# Altium PCB CopterControl 3D.PcbDoc (part 2 of 2)
Units mil, origin at the board's own origin, x right, y up, seen from the top; angles counter-clockwise.
Board outline 1417.32 x 1417.32 mil, 2 copper layers (Top Layer, Bottom Layer), stack 61.2 mil thick; 64 components, 58 nets, 262 pads, 81 vias.
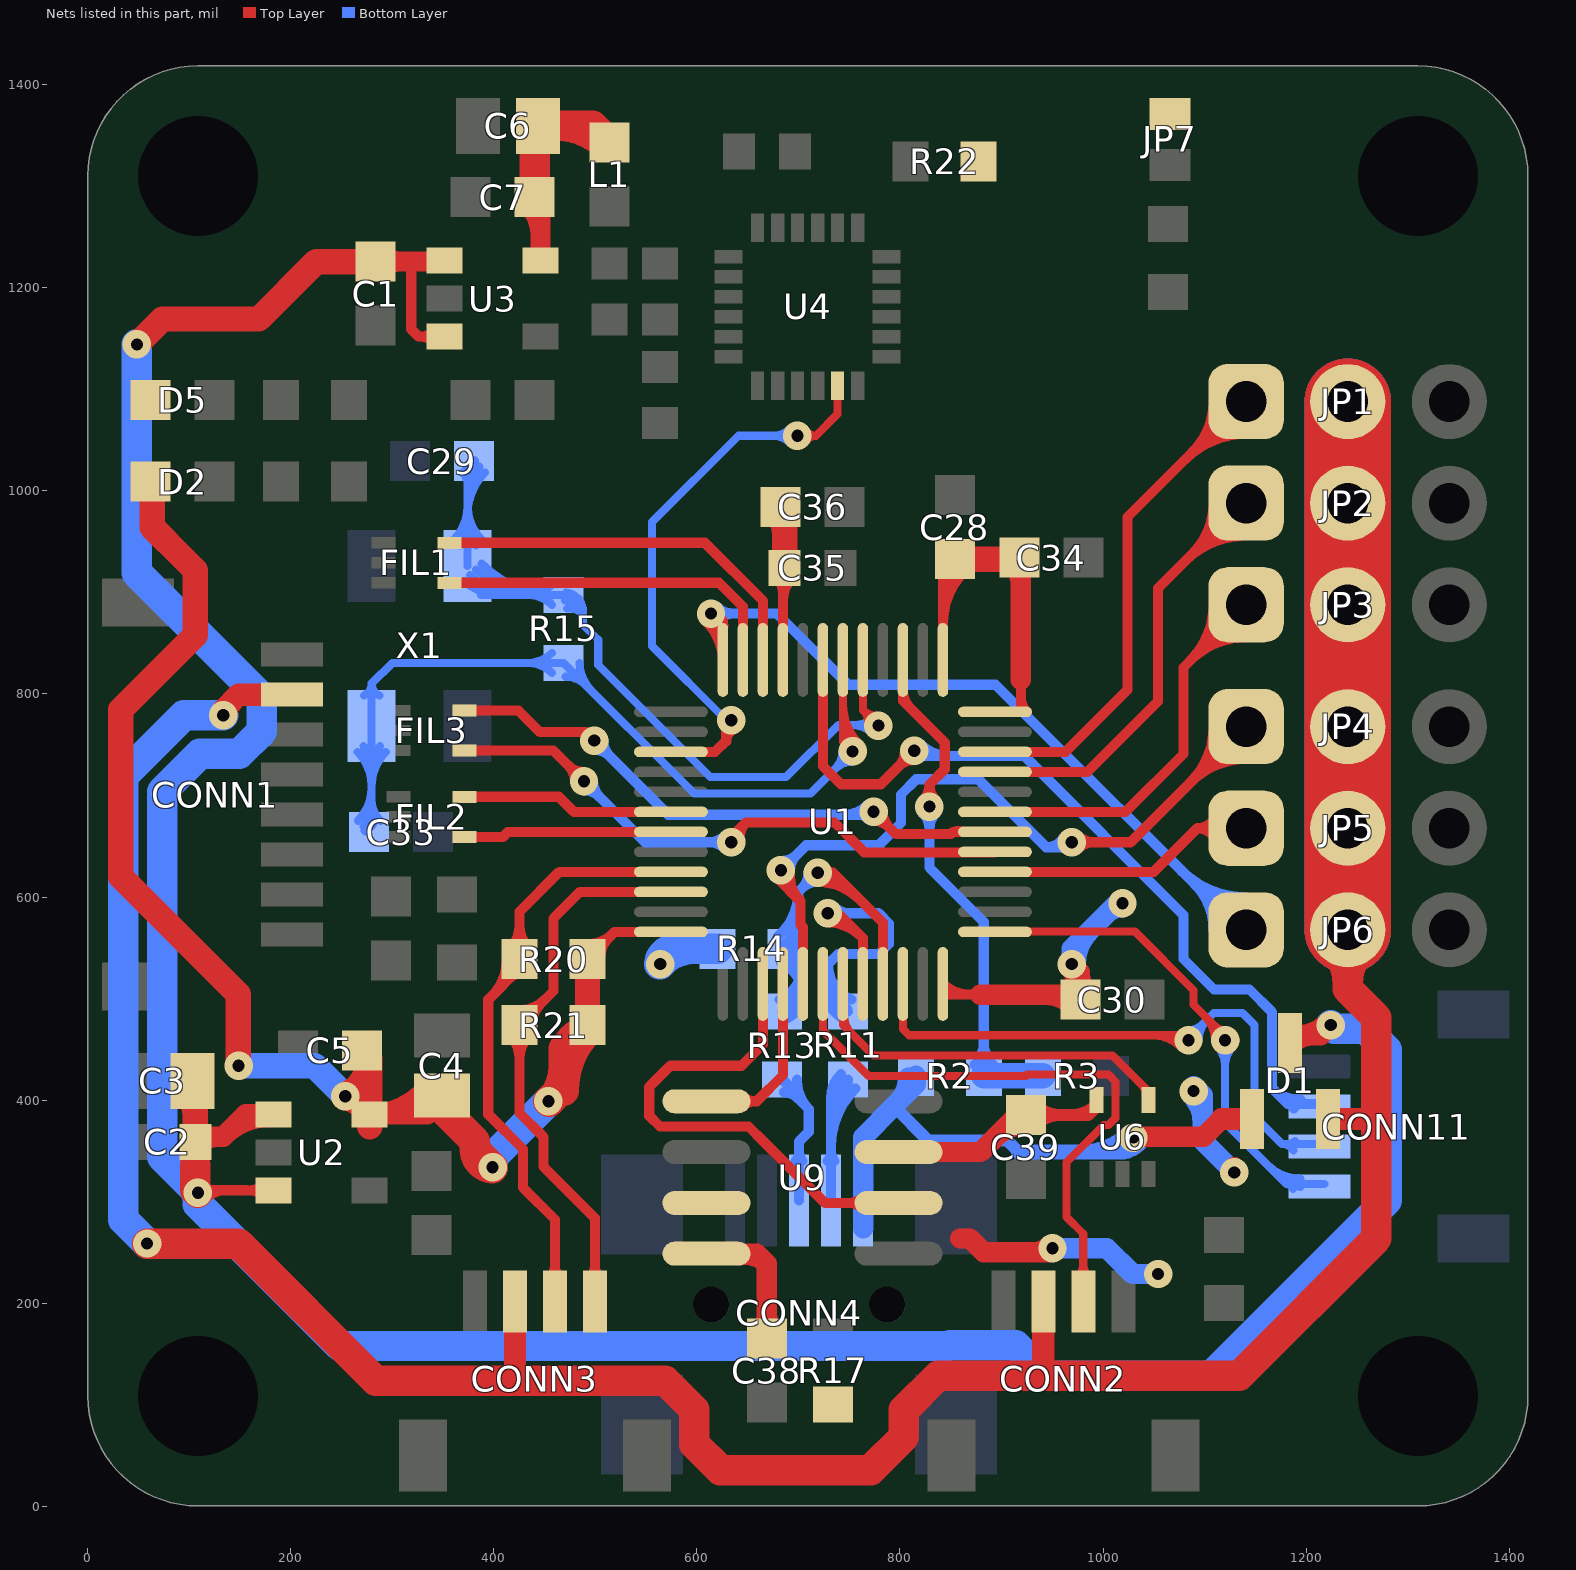
[diagram p2: the nets of this part, all layers, seen from the top]

## Via types
v1: diameter 28, hole 12, Top Layer to Bottom Layer, tented both sides, 81 vias

## Nets (pads, with @x,y where several pads share a name; then routed paths per layer and width w, separated by ;. In a path a pad name is that pad's centre, name@x,y a point inside that pad or via, vN(x,y) a via of type N, cw(c..) or ccw(c..) an arc to the next point about the centre after c; other vN are vias at no path point) (continued)
NetU1_27: U1.27 U9.2 | length 523.8
  Top Layer w10: U1.27@665.1,514.55 665.1,455.1 644,434 574,434 553.2,413.2 553.2,384.8 563.81,374.19 650.91,374.19 665.82,359.28 726.09,299 U9.2@798.49,299 ; U9.2@762.18,294.18 ccw(c750.55,282.56) 750.55,299 ccw(c750.55,315.44) U9.2@762.18,303.82
NetU1_28: U1.28 U9.5 | length 201.6
  Top Layer w10: U9.5@609.51,399 659,399 684.79,424.79 U1.28@684.79,514.55 ; U9.5@645.82,394.18 cw(c657.45,382.56) 657.45,399 cw(c657.45,415.44) U9.5@645.82,403.82
NRST: CONN11.2 U1.7 | length 942.4
  Top Layer w10: U1.7@724.16,833.45 724.16,728.84 742,711 781,711 809,739 814,739 v1(814,744) ; v1@805,744 cw(c783.27,744) 798.64,728.64 cw(c814,713.27) v1@814,735
  Bottom Layer w10: v1(814,744) 814,739 922.18,739 1079,582.18 1079,539 1109,509 1144,509 1166,487 1166,412 ; v1@820.36,750.36 ccw(c847.8,777.8) 847.8,739 ; CONN11.2@1187.64,391.83 ccw(c1181.58,390.12) 1181.58,396.42 ; CONN11.2@1194.13,400.5 cw(c1193.77,439.77) 1166,412 ; CONN11.2@1217.9,396.42 1181.58,396.42 ; 1166,412 1181.58,396.42
OSC_IN: C29.2 R15.2 U1.5 X1.3 | length 1407.7
  Top Layer w8: U1.5@763.53,833.45 763.53,784.07 ; v1@768.83,769.62 ccw(c750.57,771.12) 763.53,784.07 ; v1@777.98,778.77 cw(c776.48,797.02) 763.53,784.07 ; v1(778.8,768.8) 763.53,784.07
  Bottom Layer w8: X1.3@360.64,951.69 ccw(c327.14,985.19) 374.51,985.19 ccw(c421.88,985.19) X1.3@388.38,951.69 ; X1.3@366.29,946.04 ccw(c346.45,965.88) 374.51,965.88 ccw(c402.57,965.88) X1.3@382.73,946.04 ; C29.2@369.4,1017.91 cw(c357.08,1005.58) 374.51,1005.58 ; X1.3@371.41,911.1 ccw(c404.34,944.02) 404.34,897.46 ; X1.3@374.51,926.01 C29.2@374.51,1023.01 ; 374.51,976.68 cw(c432.81,976.68) C29.2@391.59,1017.91 ; 374.51,996 cw(c413.5,996) C29.2@385.93,1023.56 ; X1.3@377.07,916.76 ccw(c423.65,963.34) 423.65,897.47 ; X1.3@382.73,922.41 ccw(c442.96,982.65) 442.96,897.46 ; X1.3@387.47,897.47 R15.2@469,897.47 488,878.46 ; X1.3@388.38,928.07 ccw(c462.28,1001.96) R15.2@462.28,897.46 ; 432.29,902.86 ccw(c438.66,938.28) R15.2@459.2,908.73 ; 436.29,902.14 cw(c430.94,872.37) R15.2@455.77,889.64 ; R15.2@457.33,887.77 ccw(c433.92,864.35) 433.92,897.46 ccw(c433.92,930.58) R15.2@457.33,907.16 ; R15.2@470.42,891.77 cw(c468.57,872.43) 488,872.43 ; R15.2@471.19,899.74 cw(c469.41,881.24) R15.2@488,881.24 ; R15.2@472.55,883.84 cw(c474.72,865.18) 488,878.47 ; R15.2@484.13,893.61 ccw(c498.83,889.3) 488,878.46 ; 753.34,769.34 cw(c753.34,743.34) v1@771.73,761.73 ; 755.97,769.34 ccw(c755.97,791.63) v1@771.73,775.87 ; v1@769.32,765.6 ccw(c764.11,763.84) 764.11,769.34 ; v1@769.7,772.94 cw(c764.11,775.48) 764.11,769.34 ; v1(778.8,768.8) 778.14,768.14 765.31,768.14 764.11,769.34 ; 488,878.46 488,868.23 503,853.23 503,828.23 613.23,718 688,718 739.34,769.34 764.11,769.34
  Bottom Layer w10: C29.2@374.51,1023.01 C29.2@380.5,1029
OSC_OUT: C33.2 R15.1 U1.6 X1.1 | length 1238.7
  Top Layer w8: 743.84,771.11 ccw(c781.11,771.11) v1@754.76,744.76 ; 743.84,790.42 ccw(c800.42,790.42) v1@760.41,750.41 ; U1.6@743.84,833.45 743.84,752.84 v1(753.34,743.34)
  Bottom Layer w8: X1.1@266.15,742.84 cw(c232.65,709.34) 280.02,709.34 cw(c327.39,709.34) X1.1@293.9,742.84 ; C33.2@266.41,675.09 ccw(c233.55,707.95) 280.02,707.95 ; X1.1@271.8,748.5 cw(c251.96,728.66) 280.02,728.66 cw(c308.08,728.66) X1.1@288.24,748.5 ; C33.2@272.07,669.43 ccw(c252.87,688.63) 280.02,688.63 ; X1.1@272.33,798.39 ccw(c267.38,810.02) 280.02,810.02 ; C33.2@280.02,671.52 X1.1@280.02,768.53 280.02,810.02 ; 280.02,695.78 ccw(c309.29,695.78) C33.2@288.59,675.09 ; X1.1@287.71,798.39 cw(c292.66,810.02) 280.02,810.02 ; R15.1@457.33,820.84 ccw(c433.92,797.42) 433.92,830.53 ccw(c433.92,863.65) R15.1@457.33,840.23 ; R15.1@470.97,816.82 cw(c470.97,788.46) 491.02,808.51 ; R15.1@484.68,830.53 ccw(c522.55,830.53) 495.78,803.76 ; v1@743.34,743.34 cw(c719.2,743.34) 736.27,726.27 cw(c753.34,709.2) v1@753.34,733.34 ; v1@754,744 v1(753.34,743.34) 712,702 597.53,702 R15.1@469,830.53 300.53,830.53 280.02,810.02
  Bottom Layer w10: C33.2@274,665.5 C33.2@280.02,671.52
S1_IN: FIL3.5 U1.42 | length 691.1
  Top Layer w10: FIL3.5@371.48,783.69 424.31,783.69 445.68,762.32 490.68,762.32 v1(499,754) ; v1@774,675 cw(c774,653.27) 789.36,668.64 cw(c804.73,684) v1@783,684 ; v1(774,684) 796,662 850.18,662 ; U1.42@862.15,663.96 ccw(c857.54,654.65) 850.18,662 ; U1.42@893.45,664.16 852.34,664.16 850.18,662
  Bottom Layer w10: v1@499,745 cw(c499,723.27) 514.36,738.64 cw(c529.73,754) v1@508,754 ; v1(499,754) 572,681 771,681 v1(774,684) ; 745.03,681 ccw(c745.03,712.97) v1@767.64,690.36 ; 759.51,681 cw(c759.51,669.51) v1@767.64,677.64
S1_OUT: JP1.1 U1.46 | length 694.5
  Top Layer w10: U1.46@893.45,742.9 962.9,742.9 1024,804 1024,974 1137.73,1087.73 JP1.1@1140.73,1087.73 ; 1080.99,1030.99 cw(c1140.73,971.24) JP1.1@1140.73,1055.73 ; 1088.23,1038.23 ccw(c1038.72,1087.73) JP1.1@1108.73,1087.73 ; 1098.06,1048.06 cw(c1140.73,1005.38) JP1.1@1140.73,1065.73 ; 1105.3,1055.3 ccw(c1072.86,1087.73) JP1.1@1118.73,1087.73
S2_IN: FIL3.4 U1.41 | length 704.3
  Top Layer w10: FIL3.4@371.48,744.32 458.68,744.32 v1(489,714) ; v1@480,714 ccw(c458.27,714) 473.64,729.36 ccw(c489,744.73) v1@489,723 ; v1(634,654) 634,659 648.32,673.32 ; v1@642.85,655.65 cw(c662.33,659.3) 648.32,673.32 ; U1.41@893.45,644.47 892.98,644 764.91,644 735.6,673.32 648.32,673.32
  Bottom Layer w10: v1@489,705 cw(c489,683.27) 504.36,698.64 cw(c519.73,714) v1@498,714 ; v1(489,714) 549,654 v1(634,654) ; v1@627.64,647.64 ccw(c612.27,632.27) 612.27,654 ccw(c612.27,675.73) v1@627.64,660.36
S2_OUT: JP2.1 U1.45 | length 626.9
  Top Layer w10: U1.45@893.45,723.21 984.57,723.21 1054,792.64 1054,904 1137.73,987.73 JP2.1@1140.73,987.73 ; 1080.99,930.99 cw(c1140.73,871.24) JP2.1@1140.73,955.73 ; 1088.23,938.23 ccw(c1038.72,987.73) JP2.1@1108.73,987.73 ; 1098.06,948.06 cw(c1140.73,905.38) JP2.1@1140.73,965.73 ; 1105.3,955.3 ccw(c1072.86,987.73) JP2.1@1118.73,987.73
S3_IN: FIL2.5 U1.18 | length 209.2
  Top Layer w10: FIL2.5@371.48,698.69 464.16,698.69 479,683.84 U1.18@574.55,683.84
S3_OUT: JP3.1 U1.43 | length 586.4
  Top Layer w10: U1.43@893.45,683.84 1022.03,683.84 1079,740.82 1079,826 JP3.1@1140.73,887.73 ; JP3.1@1108.73,887.73 cw(c1031.48,887.73) 1086.11,833.11 cw(c1140.73,778.48) JP3.1@1140.73,855.73 ; JP3.1@1118.73,887.73 cw(c1065.62,887.73) 1103.18,850.18 cw(c1140.73,812.62) JP3.1@1140.73,865.73
S4_IN: FIL2.4 U1.19 | length 202.7
  Top Layer w10: FIL2.4@374,659 409,659 414,664 574.39,664 U1.19@574.55,664.16
S4_OUT: JP4.1 U1.29 | length 1069.3
  Top Layer w10: v1@681.78,626.52 ccw(c700.99,624.35) 687.32,610.68 ; v1(682.77,626.41) 681.59,626.41 679.68,628.32 679,629 679,619 702,596 ; v1@691.72,625.4 ccw(c727.37,621.37) 702,596 ; U1.29@704.47,514.55 704.47,570.34 702,572.82 702,596 ; v1(969,654) 1027,654 JP4.1@1140.73,767.73 ; v1@975.36,647.64 cw(c990.73,632.27) 990.73,654 cw(c990.73,675.73) v1@975.36,660.36 ; JP4.1@1108.73,767.73 cw(c1031.48,767.73) 1086.11,713.11 cw(c1140.73,658.48) JP4.1@1140.73,735.73 ; JP4.1@1118.73,767.73 cw(c1065.62,767.73) 1103.18,730.18 cw(c1140.73,692.62) JP4.1@1140.73,745.73
  Bottom Layer w10: v1(682.77,626.41) 681.59,626.41 679.68,628.32 679,629 685.82,629 707.82,651 779.18,651 801,672.82 801,701 816,716 877,716 944,649 ; v1@682.77,635.41 ccw(c682.77,658.22) 698.9,642.09 ; v1@691.77,626.41 cw(c712.42,626.41) 697.82,641 ; v1@961.33,658.7 cw(c944,669.32) 944,649 ; v1(969,654) 964,649 944,649
S5_IN: FIL1.5 U1.10 | length 390.4
  Top Layer w10: FIL1.5@356.48,948.69 607.95,948.69 665.1,891.54 U1.10@665.1,833.45
S5_OUT: JP5.1 U1.40 | length 312.1
  Top Layer w10: U1.40@893.45,624.79 1049.79,624.79 1092.73,667.73 ; JP5.1@1111.2,655.43 ccw(c1092.74,647.74) 1092.74,667.73 ; JP5.1@1111.2,680.04 cw(c1092.74,687.73) 1092.74,667.73 ; JP5.1@1140.73,667.73 1092.73,667.73
S6_IN: FIL1.4 U1.11 | length 351
  Top Layer w10: FIL1.4@356.48,909.32 621.87,909.32 645.42,885.77 U1.11@645.42,833.45
S6_OUT: JP6.1 U1.12 | length 1079.2
  Top Layer w10: v1@607.93,872.36 cw(c571.01,831.97) U1.12@625.73,831.97 ; v1(614,879) 618.54,879 625.73,871.81 U1.12@625.73,833.45 ; v1@614.67,879.74 cw(c591.75,854.65) U1.12@625.73,854.65 ; v1@616.9,870.48 cw(c619.43,863.05) U1.12@626.23,866.97 ; v1@620.3,877.25 cw(c607.7,864.65) U1.12@625.52,864.65
  Bottom Layer w10: v1(614,879) 679,879 749,809 894,809 1135.27,567.73 JP6.1@1140.73,567.73 ; v1@620.36,872.64 cw(c635.73,857.27) 635.73,879 cw(c635.73,900.73) v1@620.36,885.36 ; 1076.77,626.23 ccw(c1140.73,690.19) JP6.1@1140.73,599.73 ; 1089.97,613.03 cw(c1044.68,567.73) JP6.1@1108.73,567.73 ; 1093.84,609.16 ccw(c1140.73,656.05) JP6.1@1140.73,589.73 ; JP6.1@1107.04,595.96 cw(c1078.82,567.73) JP6.1@1118.73,567.73 ; JP6.1@1110.91,592.09 ccw(c1140.73,621.91) JP6.1@1140.73,579.73
SCK: U1.15 U4.23 | length 643
  Top Layer w8: v1(699,1054) 717.23,1054 ; v1@707.43,1048.63 cw(c717.23,1042.38) 717.23,1054 ; v1@707.43,1059.37 ccw(c717.23,1065.62) 717.23,1054 ; U4.23@738.53,1103.41 738.53,1075.3 717.23,1054
  Top Layer w10: U1.15@574.55,742.9 617.9,742.9 629,754 629,769 v1(634,774) ; 629,753.39 cw(c642.18,753.39) v1@637.32,765.63
  Bottom Layer w8: v1(634,774) 629,774 556,847 556,969 641,1054 v1(699,1054) ; v1@691.93,1046.93 ccw(c674.86,1029.86) 674.86,1054 ccw(c674.86,1078.14) v1@691.93,1061.07
SWDCLK: CONN11.4 U1.37 | length 643.2
  Top Layer w8: U1.37@893.72,566 1031.25,566 1089,508.25 1089,494 v1@1120,463 ; 1100.1,482.9 cw(c1076.2,459) v1@1110,459 ; 1109.76,473.24 ccw(c1120,483.49) v1@1120,469
  Top Layer w10: U1.37@893.45,565.73 U1.37@893.72,566 ; v1(1120,459) v1@1120,463
  Bottom Layer w8: v1@1112.93,451.93 cw(c1095.86,434.86) 1120,434.86 cw(c1144.14,434.86) v1@1127.07,451.93 ; v1(1120,459) 1120,378 1180.32,317.68 ; 1161.84,336.16 ccw(c1194.2,368.51) CONN11.4@1194.2,322.76 ; 1175.5,322.5 ccw(c1194.2,341.2) CONN11.4@1194.2,314.76 ; 1181.94,317.68 ccw(c1181.94,327.2) CONN11.4@1188.67,320.47 ; CONN11.4@1186.67,312.85 ccw(c1180.32,311.09) 1180.32,317.68 ; CONN11.4@1217.9,317.68 1180.32,317.68
  Bottom Layer w10: v1(1120,459) v1@1129,459
SWDIO: CONN11.3 U1.34 | length 694.4
  Top Layer w8: U1.34@802.9,514.55 802.9,470.1 809,464 1084,464 v1(1084,459) ; 1047.79,464 cw(c1047.79,422.79) v1@1076.93,451.93 ; 1067.1,464 cw(c1067.1,442.1) v1@1082.59,457.59
  Bottom Layer w8: v1@1084,461.18 1108.82,486 1137,486 1149,474 1149,384 1175.95,357.05 ; v1@1084,469 ccw(c1084,487.87) 1097.34,474.53 ; v1@1094,459 cw(c1123.41,459) 1102.62,479.8 ; 1181.94,357.05 ccw(c1181.94,366.58) CONN11.3@1188.67,359.84 ; CONN11.3@1187.43,350.42 ccw(c1175.95,343.8) 1175.95,357.05 ; CONN11.3@1217.9,357.05 1175.95,357.05
  Bottom Layer w10: v1(1084,459) v1@1084,461.18
TO_REGS: C1.1 C2.1 C3.1 D1.3 U2.1 U2.3 U3.1 U3.3 | length 3563.7
  Top Layer w10: v1@106.56,311.44 156.56,311.44 156.67,311.33 U2.3@183.49,311.33 ; v1@115.36,302.64 cw(c136.62,281.38) 136.62,311.44 ; v1@115.36,315.36 ccw(c124.84,324.84) 124.84,311.44 ; U2.3@173.05,305.82 ccw(c159.75,292.51) 159.75,311.33 ccw(c159.75,330.15) U2.3@173.05,316.84 ; 319,1225.5 319,1159 326.4,1151.6 U3.3@351.76,1151.6 ; U3.3@341.32,1146.09 ccw(c328.02,1132.78) 328.02,1151.6 ccw(c328.02,1170.42) U3.3@341.32,1157.11
  Top Layer w20: C2.1@104,364 106.56,364 134,364 156.13,386.13 U2.1@183.49,386.13 ; 106.56,336.44 C2.1@106.56,359 ; C2.1@110.62,356.9 cw(c127.76,339.77) 127.76,364 ; 135.5,365.5 cw(c178.57,322.43) U2.1@178.57,383.34 ; C1.1@284,1225.5 319,1225.5 350.85,1225.5 U3.1@351.76,1226.4 ; C1.1@290.85,1218.65 cw(c307.38,1202.12) 307.38,1225.5 cw(c307.38,1248.88) C1.1@290.85,1232.35 ; D1.3@1184,456.4 D1.3@1191.6,464 ; D1.3@1185.28,455.12 cw(c1206.72,433.68) 1206.72,464 ; v1@1221.09,476.74 cw(c1191.6,504.49) D1.3@1191.6,464 ; v1(1224,474) 1214,464 D1.3@1191.6,464
  Top Layer w25: v1(49,1144) 74,1169 169,1169 225.5,1225.5 C1.1@284,1225.5 ; C3.1@97.05,406.62 cw(c74.11,383.68) 106.56,383.68 ; C3.1@103.53,419 106.56,415.97 106.56,364 C2.1@106.56,359
  Top Layer w30: 106.56,336.44 106.56,311.44 v1(109,309)
  Bottom Layer w30: v1(49,1144) 49,919 172,796 172,763.26 149.74,741 111,741 73.73,703.73 73.73,344.27 v1(109,309) 109,297.71 248.58,158.13 848.13,158.13 849,159 914,159 944,129 1106.65,129 1279,301.35 1279,449.54 1257.94,470.6 1227.4,470.6 v1(1224,474) ; v1@108,309 ccw(c132.85,309) 115.28,291.43
UART1_RX: U1.31 U6.4 | length 405.8
  Top Layer w8: U1.31@743.84,514.55 743.84,474.16 774,444 1009.11,444 1044.59,408.52 U6.4@1044.59,400.42 ; U1.31@745.06,483.35 ccw(c770.19,483.35) 752.42,465.58 ; 1038.11,415 cw(c1029.42,406.32) U6.4@1041.7,406.32
UART1_TX: CONN2.3 U1.30 | length 631.3
  Top Layer w8: U1.30@724.16,514.55 724.16,468.84 769,424 924,424 925.21,425.21 1005.27,425.21 1012.3,418.18 1012.3,382.65 1005.27,375.62 1000.62,375.62 964,339 964,285 980.42,268.58 CONN2.3@980.42,201.84 ; CONN2.3@974.89,226.06 ccw(c961.56,239.39) 980.42,239.39 ccw(c999.28,239.39) CONN2.3@985.94,226.06
UART3_RX: CONN3.4 R21.1 U1.22 | length 670.4
  Top Layer w10: R21.1@416.54,463.04 cw(c394.84,441.33) 425.54,441.33 cw(c456.24,441.33) R21.1@434.53,463.04 ; R21.1@425.54,488.68 ccw(c425.54,524.14) 450.6,499.07 ; R21.1@438.25,475.97 cw(c464.2,475.97) 445.85,494.32 ; CONN3.4@494.97,225.35 ccw(c483.34,236.98) 499.79,236.98 ccw(c516.23,236.98) CONN3.4@504.6,225.35 ; CONN3.4@499.79,201.84 499.79,284 449,334.79 449,364 425.54,387.46 R21.1@425.54,474 459,507.46 459,579 485.1,605.1 U1.22@574.55,605.1
UART3_TX: CONN3.3 R20.1 U1.21 | length 730
  Top Layer w10: 398.7,502.95 ccw(c364.62,537.03) R20.1@412.82,537.03 ; R20.1@415.77,520.02 ccw(c398.77,537.03) R20.1@422.82,537.03 ; R20.1@416.2,520.45 cw(c425.53,511.11) R20.1@425.53,524.31 ; R20.1@416.54,549.96 ccw(c394.83,571.67) 425.53,571.67 ccw(c456.24,571.67) R20.1@434.53,549.96 ; CONN3.3@455.6,225.35 ccw(c443.97,236.98) 460.42,236.98 ccw(c476.86,236.98) CONN3.3@465.23,225.35 ; CONN3.3@460.42,201.84 460.42,282.58 429,314 429,351.99 394.82,386.17 394.82,499.07 425.53,529.78 R20.1@425.53,539 425.53,585.53 464.79,624.79 U1.21@574.55,624.79
USB_D_N: R11.1 U1.32 | length 533.3
  Top Layer w10: v1@729,575 cw(c729,529.13) 761.44,561.56 ; v1(729,584) 739,584 763.53,559.47 U1.32@763.53,514.55 ; v1@729,585 cw(c729,563.27) 744.36,578.64
  Bottom Layer w10: 729,503.73 ccw(c753.97,503.73) R11.1@744.18,480.76 ; 729,518.86 ccw(c760.42,518.86) R11.1@748.1,489.96 ; v1(729,584) 779,584 789,574 789,554 779,544 739,544 729,534 ; R11.1@734.52,489.75 ccw(c714.88,493.35) 729,507.47 ; v1@735.36,577.64 cw(c750.73,562.27) 750.73,584 cw(c750.73,605.73) v1@735.36,590.36 ; R11.1@746.88,500.18 cw(c746.59,525.05) 729,507.46 ; R11.1@749,487.47 729,507.47 ; R11.1@752.02,499.16 cw(c766.87,534) 729,534 ; 729,507.47 729,534
USB_D_P: R13.1 R14.2 U1.33 | length 764
  Top Layer w10: v1@719,615 cw(c719,557.06) 759.97,598.03 ; v1(719,624) 734,624 ; v1@719,625 cw(c719,591.2) 742.9,615.1 ; v1@726.94,619.77 cw(c734,616) 734,624 ; v1@726.94,628.23 ccw(c734,632) 734,624 ; U1.33@783.21,514.55 783.21,574.79 734,624
  Bottom Layer w10: R14.2@679.31,560.72 ccw(c642.29,605) 700,605 ; R13.1@681.35,499.31 ccw(c668.42,532.46) R14.2@704,532.46 ; R14.2@682.83,535.19 cw(c670.66,504.15) 704,504.15 ; R13.1@684,487.47 704,507.46 ; R13.1@684.98,490 ccw(c674.13,517.83) 704,517.83 ; R14.2@685.72,553.05 ccw(c660.18,583.6) 700,583.6 ; R13.1@686.12,500.18 ccw(c686.41,525.05) 704,507.46 ; R14.2@686.47,544.5 cw(c676.41,518.81) 704,518.81 ; R13.1@688.62,480.68 ccw(c679.83,503.19) 704,503.19 ; R14.2@690.12,553.81 cw(c682.15,533.47) R14.2@704,533.47 ; R13.1@698.48,489.75 cw(c718.11,493.35) 704,507.46 ; v1@710,624 cw(c688.27,624) 703.64,608.64 cw(c719,593.27) v1@719,615 ; v1(719,624) 700,605 ; 700,605 700,561.53 R14.2@687.47,549 R14.2@704,532.46 ; 704,507.46 R14.2@704,532.46
USB_PWR: CONN4.1 D1.1 R2.1 | length 680.9
  Top Layer w20: v1(1029.71,363.29) 1030.42,364 1099,364 1116.6,381.6
  Top Layer w22: 1116.6,381.6 D1.1@1146.6,381.6
  Bottom Layer w12: 794,394 827.52,360.48 905.48,360.48 916.96,349
  Bottom Layer w15: 916.96,349 1015.42,349 v1(1029.71,363.29) ; 979.51,349 ccw(c979.51,413.49) v1@1025.11,367.89 ; 1015.73,349 ccw(c1015.73,377.27) v1@1035.72,357.28 ; v1@1023.21,363.29 cw(c1007.52,363.29) 1018.61,352.2 cw(c1029.71,341.1) v1@1029.71,356.79
  Bottom Layer w20: CONN4.1@763.73,273.78 CONN4.1@763.73,301.21 763.73,363.73 794,394 815.53,415.53 R2.1@815.53,424 ; 797.77,397.77 ccw(c773.51,422.03) R2.1@807.82,422.03
USB_R_N: CONN4.2 R11.2 | length 279.2
  Bottom Layer w10: CONN4.2@728.81,340.06 ccw(c720.54,348.33) 732.23,348.33 ccw(c743.92,348.33) CONN4.2@735.65,340.06 ; CONN4.2@732.23,301.21 732.23,403.76 R11.2@749,420.53 ; 732.23,354.1 cw(c813.47,354.1) R11.2@756.02,411.54 ; 732.23,378.24 cw(c789.33,378.24) R11.2@748.95,418.61 ; 732.23,402.38 cw(c765.19,402.38) R11.2@741.88,425.69
USB_R_P: CONN4.3 R13.2 | length 229.6
  Bottom Layer w10: R13.2@684,420.53 700.73,403.8 700.73,400.73 ; CONN4.3@697.31,340.06 ccw(c689.04,348.33) 700.73,348.33 ccw(c712.42,348.33) CONN4.3@704.16,340.06 ; R13.2@697.73,415.7 ccw(c710.47,410.47) 700.73,400.73 ; R13.2@698.68,420.16 ccw(c737.84,419.02) 710.14,391.32 ; CONN4.3@700.73,301.21 700.73,359.55 710.14,368.96 710.14,391.32 ; 700.73,400.73 710.14,391.32 ; R13.2@685.97,407.82 cw(c685.97,389.29) 699.07,402.39 ccw(c685.97,389.29) R13.2@685.97,407.82
VBUS_SEN: R2.2 R3.2 U1.3 | length 646.8
  Top Layer w10: U1.3@802.9,833.45 802.9,793.29 844.03,752.15 844.03,725.85 829,710.82 v1(829,689) ; U1.3@803.11,802.25 ccw(c825.27,802.25) 809.6,786.58 ; v1@822.64,695.36 ccw(c807.27,710.73) 829,710.73 ccw(c850.73,710.73) v1@835.36,695.36
  Bottom Layer w10: v1@822.64,682.64 cw(c807.27,667.27) 829,667.27 cw(c850.73,667.27) v1@835.36,682.64 ; v1(829,689) 829,629 882.47,575.53 R2.2@882.47,424 ; R2.2@873.47,434.96 ccw(c851.76,456.67) 882.47,456.67 ccw(c913.17,456.67) R2.2@891.46,434.96
  Bottom Layer w25: R2.2@882.47,424 R3.2@940.53,424
VCC: C4.1 C5.1 C28.2 C30.2 C34.2 C35.1 C36.2 C38.1 C39.1 D2.2 D5.2 JP7.2 R14.1 R17.1 R20.2 R21.2 R22.2 U1.1 U1.9 U1.24 U1.36 U1.48 U2.5 U6.5 U9.3 U9.7 U9.8 | length 4161.9
  Top Layer w10: R20.2@492.47,539 519.2,565.73 U1.24@574.55,565.73 ; R20.2@492.47,553.68 ccw(c492.47,589.14) 517.53,564.07 ; R20.2@505.18,540.97 cw(c531.13,540.97) 512.78,559.32 ; C35.1@678.84,914.43 cw(c664.48,900.08) 684.79,900.08 ; U1.9@684.79,833.45 684.79,922.35 C35.1@686.44,924 ; 684.79,892.09 cw(c716.38,892.09) C35.1@694.04,914.43 ; U1.36@842.27,514.55 842.27,505.73 844,504 879,504 ; U1.1@842.27,833.45 842.27,920.77 C28.2@854,932.5 ; U1.1@842.27,868.73 cw(c917.77,868.73) C28.2@864.38,922.12 ; 842.27,892.87 cw(c893.63,892.87) C28.2@857.31,929.19 ; U1.36@842.42,514.7 ccw(c868.26,540.55) 868.26,504 ; U1.48@919,784 919,814 ; 919,796.43 ccw(c938.81,796.43) U1.48@924.8,782.42
  Top Layer w12: C39.1@924,385.5 985.04,385.5 993.41,393.86 U6.5@993.41,400.42 ; C39.1@933.68,375.82 cw(c957.04,352.46) 957.04,385.5 cw(c957.04,418.53) C39.1@933.68,395.17 ; 969.49,385.5 ccw(c969.49,418.43) U6.5@992.78,395.14
  Top Layer w20: U2.5@277.98,386.13 334.6,386.13 C4.1@349,400.53 ; U2.5@277.98,386.13 ccw(c277.98,460.16) C4.1@334.24,412.05 ; 321.4,386.13 ccw(c321.4,423.03) C4.1@349.44,399.05 ; U9.8@609.51,249 659,249 669,239 ; U9.8@641.38,247.23 cw(c647.59,217.59) 669,239 ; C38.1@662.15,172.34 ccw(c645.62,188.88) 669,188.88 ccw(c692.38,188.88) C38.1@675.85,172.34 ; C38.1@670.83,165.49 C38.1@669,165.49 669,239 ; R17.1@734,100.54 R17.1@734,102.33 ; U9.3@798.49,349 879.25,349 915.75,385.5 C39.1@924,385.5 ; 859,264 868.75,264 882.4,250.35 949.31,250.35 950.11,251.16 v1(950.11,254.35) ; 879,504 972.5,504 C30.2@977,499.5 ; 893.38,363.13 cw(c924,332.51) C39.1@924,375.81 ; C34.2@910.66,927.15 cw(c890.51,907.01) 919,907.01 ; C34.2@917.5,934 919,932.51 919,814 ; 919,914.23 cw(c937.28,914.23) C34.2@924.35,927.15 ; 930.8,250.35 ccw(c930.8,273.66) v1@947.28,257.18 ; 942.05,504 cw(c942.05,463.55) C30.2@970.65,492.15 ; v1@966.17,531.17 cw(c940.03,505.03) C30.2@977,505.03 ; v1@967,530.54 cw(c953.58,507.29) C30.2@979.51,514.23 ; C30.2@970.14,505.29 ccw(c954.03,519.03) v1(969,534) 977,526 C30.2@977,499.5 ; C30.2@970.65,505.85 ccw(c955.34,521.17) 977,521.17 ; v1@977,523.6 ccw(c1002.1,523.6) C30.2@984.35,505.85 ; C30.2@977.5,499 C30.2@977,499.5 ; v1(1129,329) v1@1129,334
  Top Layer w25: D2.2@57.42,1003.92 cw(c41.55,988.05) 64,988.05 ; D2.2@64,1009 64,964 94.17,933.83 ; 94.18,933.83 106.19,921.82 106.19,857.6 33.23,784.64 33.23,619.77 148.5,504.5 148.5,434.5 v1(149,434) ; v1@253.45,405.39 ccw(c239.11,441.52) C5.1@277.98,441.52 ; v1@253.76,402.52 cw(c249.19,374.1) U2.5@277.98,374.1 ; C5.1@265.41,443.92 cw(c235.09,413.59) 277.98,413.59 ; C5.1@270.5,449 C5.1@277.98,441.52 ; U2.5@272.76,386.12 ccw(c254,385.22) v1(254,404) 277.98,404 ; U2.5@277.98,386.13 277.98,404 ; R21.2@492.46,474 R20.2@492.47,539 ; C36.2@677.42,978.92 cw(c655.66,957.15) 686.44,957.15 ; C36.2@682.5,984 686.44,980.07 C35.1@686.44,924 ; C28.2@854,932.5 916.01,932.5 C34.2@917.5,934 ; 896.54,932.5 ccw(c896.54,954.96) C34.2@912.42,939.08 ; 277.98,404 C5.1@277.98,441.52
  Top Layer w30: C4.1@349,400.53 349,392.39 381.68,359.71 ; v1@398.57,333.1 cw(c411.09,359.71) 381.68,359.71 ; v1@398.94,333 cw(c400.03,351.32) 381.68,351.32 ; v1(399,334) 381.68,351.32 ; v1(454,399) 469,414 469,450.53 R21.2@492.46,474 ; v1@454.71,398.29 ccw(c420.2,432.8) 469,432.8 ; 469,409.44 cw(c554.19,409.44) R21.2@494.37,470.1 ; 469,440.21 cw(c498.71,440.21) R21.2@492.99,469.36 ; 381.68,351.32 381.68,359.71
  Bottom Layer w20: v1(950.11,254.35) 1003.65,254.35 1029,229 v1(1054,229) ; v1(969,534) 969,549 1014,594 v1(1019,594) ; v1@973,534 cw(c1018.87,534) 986.44,566.44 ; 1003.64,583.64 cw(c1019,568.27) v1@1019,590 ; v1@1086.17,406.17 cw(c1057.62,377.62) 1098,377.62 ; v1(1089,409) 1089,414 1098,405 1098,360 v1(1129,329)
  Bottom Layer w25: v1(149,434) 224,434 v1(254,404)
  Bottom Layer w30: v1@398,334 cw(c419.73,334) 404.36,349.36 ; v1(399,334) 399,344 v1(454,399) ; v1@563,534.07 cw(c579,532.96) 579,549 ; v1@563.29,534.71 cw(c597.8,500.2) 597.8,549 ; v1(564,534) 579,549 ; R14.1@620.53,549 579,549
VCC_ANA: C6.1 C7.1 L1.2 U3.5 | length 318.4
  Top Layer w20: C7.1@433.65,1282.15 cw(c403.24,1251.74) 446.24,1251.74 ; C7.1@440.5,1289 446.24,1283.25 U3.5@446.24,1226.4
  Top Layer w30: C7.1@440.5,1289 440.5,1352.03 447.46,1359 497.66,1359 L1.2@514,1342.66 ; 440.5,1329.71 cw(c466.91,1329.71) C6.1@448.23,1348.39 ; C6.1@463.24,1359 cw(c463.24,1291.9) L1.2@510.69,1339.35
VCC_UNREG: CONN1.2 CONN2.2 CONN3.2 D1.2 JP1.2 JP2.2 JP3.2 JP4.2 JP5.2 JP6.2 | length 3758.4
  Top Layer w22: v1(134,779) 134,784 149.16,799.16 CONN1.2@201.84,799.16 ; v1@137,779 cw(c156.31,779) 142.66,792.66 ; 421.05,124 CONN3.2@421.05,201.84 ; 939,129 941.05,131.05 CONN2.2@941.05,201.84 ; D1.2@1221.4,381.6 1266.4,381.6 1269,379
  Top Layer w30: v1(59,259) 149,259 284,124 421.05,124 569,124 597.59,95.41 597.59,61.67 623.26,36 771,36 803.87,68.87 803.87,95.22 837.65,129 939,129 1134,129 1269,264 1269,379 1269,481.33 1240.73,509.59 JP6.2@1240.73,567.73 ; JP6.2@1225.18,552.18 cw(c1187.62,514.62) 1240.73,514.62 cw(c1293.85,514.62) JP6.2@1256.29,552.18
  Top Layer w85: JP6.2@1240.73,567.73 JP5.2@1240.73,667.73 JP4.2@1240.73,767.73 JP3.2@1240.73,887.73 JP2.2@1240.73,987.73 JP1.2@1240.73,1087.73
  Bottom Layer w30: v1(59,259) 35.73,282.27 35.73,719.47 95.26,779 v1(134,779)
  Bottom Layer w85: JP6.2@1240.73,567.73 JP5.2@1240.73,667.73 JP4.2@1240.73,767.73 JP3.2@1240.73,887.73 JP2.2@1240.73,987.73 JP1.2@1240.73,1087.73
pads on no net: CONN1.0 CONN2.0 CONN3.0 CONN4.4 CONN4.6 U1.2 U1.4 U1.38 U4.2 U4.3 U4.4 U4.5 U4.6 U4.7 U4.14 U4.15 U4.16 U4.17 U4.19 U4.21 U4.22

## Polygon pours and split planes (outlines as drawn)
VCC on Top Layer "Top-VCC" (solid, remove dead copper, pour order 3): 0.73,109 0.73,1309.79 cw(c109,1309.79) 109,1418.06 1309.79,1418.06 cw(c1309.79,1309.79) 1418.06,1309.79 1418.06,109 cw(c1309.79,109) 1309.79,0.73 109,0.73 cw(c109,109)
GND on Bottom Layer "Bottom Layer-GND" (solid, remove dead copper, pour order 4): 0.73,109 0.73,1309.79 cw(c109,1309.79) 109,1418.06 1309.79,1418.06 cw(c1309.79,1309.79) 1418.06,1309.79 1418.06,109 cw(c1309.79,109) 1309.79,0.73 109,0.73 cw(c109,109)

## Keep-outs
Top Layer:
  circle w3.94: c109,109 r59.06
  circle w3.94: c109,109 r106.3
  circle w3.94: c1309.79,109 r59.06
  circle w3.94: c1309.79,109 r106.3
  circle w3.94: c109,1309.79 r59.06
  circle w3.94: c109,1309.79 r106.3
  circle w3.94: c1309.79,1309.79 r106.3
  circle w3.94: c1309.79,1309.79 r59.06
Bottom Layer:
  circle w3.94: c1309.43,1310.73 r106.3
  circle w3.94: c109.43,1310.73 r106.3
  circle w3.94: c109.43,110.73 r106.3
  circle w3.94: c1309.43,110.73 r106.3
Keep-Out Layer:
  the board outline again, w10

## Other copper
Top Layer:
  pour cut-out: 434,1418.06 434,1094 484,1044 774,1044 859,1129 859,1418.06

## Silkscreen, mask and mechanical layers (free items; w line width, h text height)
Top Overlay:
  circle w10: c969,329 r5
  lines w7: 1124,1169 1139,1154 ; 1139,1194 1139,1154 ; 1154,1169 1139,1154
  text "+3.3V" at 1099,1359 h50
  text "" at 919,1319 h137.8
  text "SBL" at 1104,1304 h50
  text "Sig" at 1109,1209 h50
  text "-" at 1330.73,1169.73 h90
  text "+" at 1225.73,1164.73 h80
  text "Status" at 59,1124 h60
  text "1" at 1034,1084 h65
  text "2" at 1034,984 h65
  text "CC3D" at 339,974 h100
  text "Power" at 64,934 h60
  text "3" at 1034,884 h65
  text "4" at 1034,759 h65
  text "5" at 1034,659 h65
  text "6" at 1034,559 h65
  text "Sig" at 1099,474 h50
  text "-" at 1329,454 h90
  text "+" at 1244,449 h80
  text "Flexi" at 209,144 h55
  text "Main" at 1094,144 h50
  text "Port" at 219,104 h55
  text "Port" at 1094,104 h55
Bottom Overlay:
  lines w7: 1129,1164 1144,1149 ; 1144,1209 1144,1149 ; 1159,1164 1144,1149
  text "B" at 587,1320 h160
  text "Rev. C" at 550,1270 h60
  text "Sig" at 1189,1229 h80
  text "-" at 1330.73,1190.73 h90
  text "+" at 1225.73,1185.73 h80
  text "A" at 1059,1124 h300
  text "www.OpenPilot.org" at 35.73,465.73 h60 r270
  text "GND" at 1174,424 h30
  text "NRST" at 1174,389 h30
  text "IO" at 1174,349 h30
  text "CLK" at 1174,294 h30
  text "SWD" at 1324,179 h40
  text "Copter" at 1230.73,120.73 h80
  text "3D" at 415.73,65.73 h120
  text "Control" at 1230.73,50.73 h80
Mechanical 1:
  the board outline again, w10
Mechanical 15:
  lines w7: 604,1076.17 604,1286.17 814,1286.17 814,1076.17 604,1076.17
Mechanical 16:
  lines w10: 239,709 414,709 414,984 239,984 239,709

## Dimensions
0.73,-18.95 to 1418.06,-28.79 on Dimensions
109,-18.95 to 1309.79,-18.95 on Dimensions
-18.95,109 to -18.95,1309.79 on Dimensions
-18.95,0.73 to -18.95,1418.06 on Dimensions
1268.03,1351.55 to -2431,-1944 on Dimensions